# Altium PCB 智能家居-开关-功率测量板.PcbDoc
Units mm, origin at the board's own origin, x right, y up, seen from the top; angles counter-clockwise.
Board outline 37.51 x 32.81 mm, 2 copper layers (Top Layer, Bottom Layer); 19 components, 16 nets, 50 pads, 0 vias.
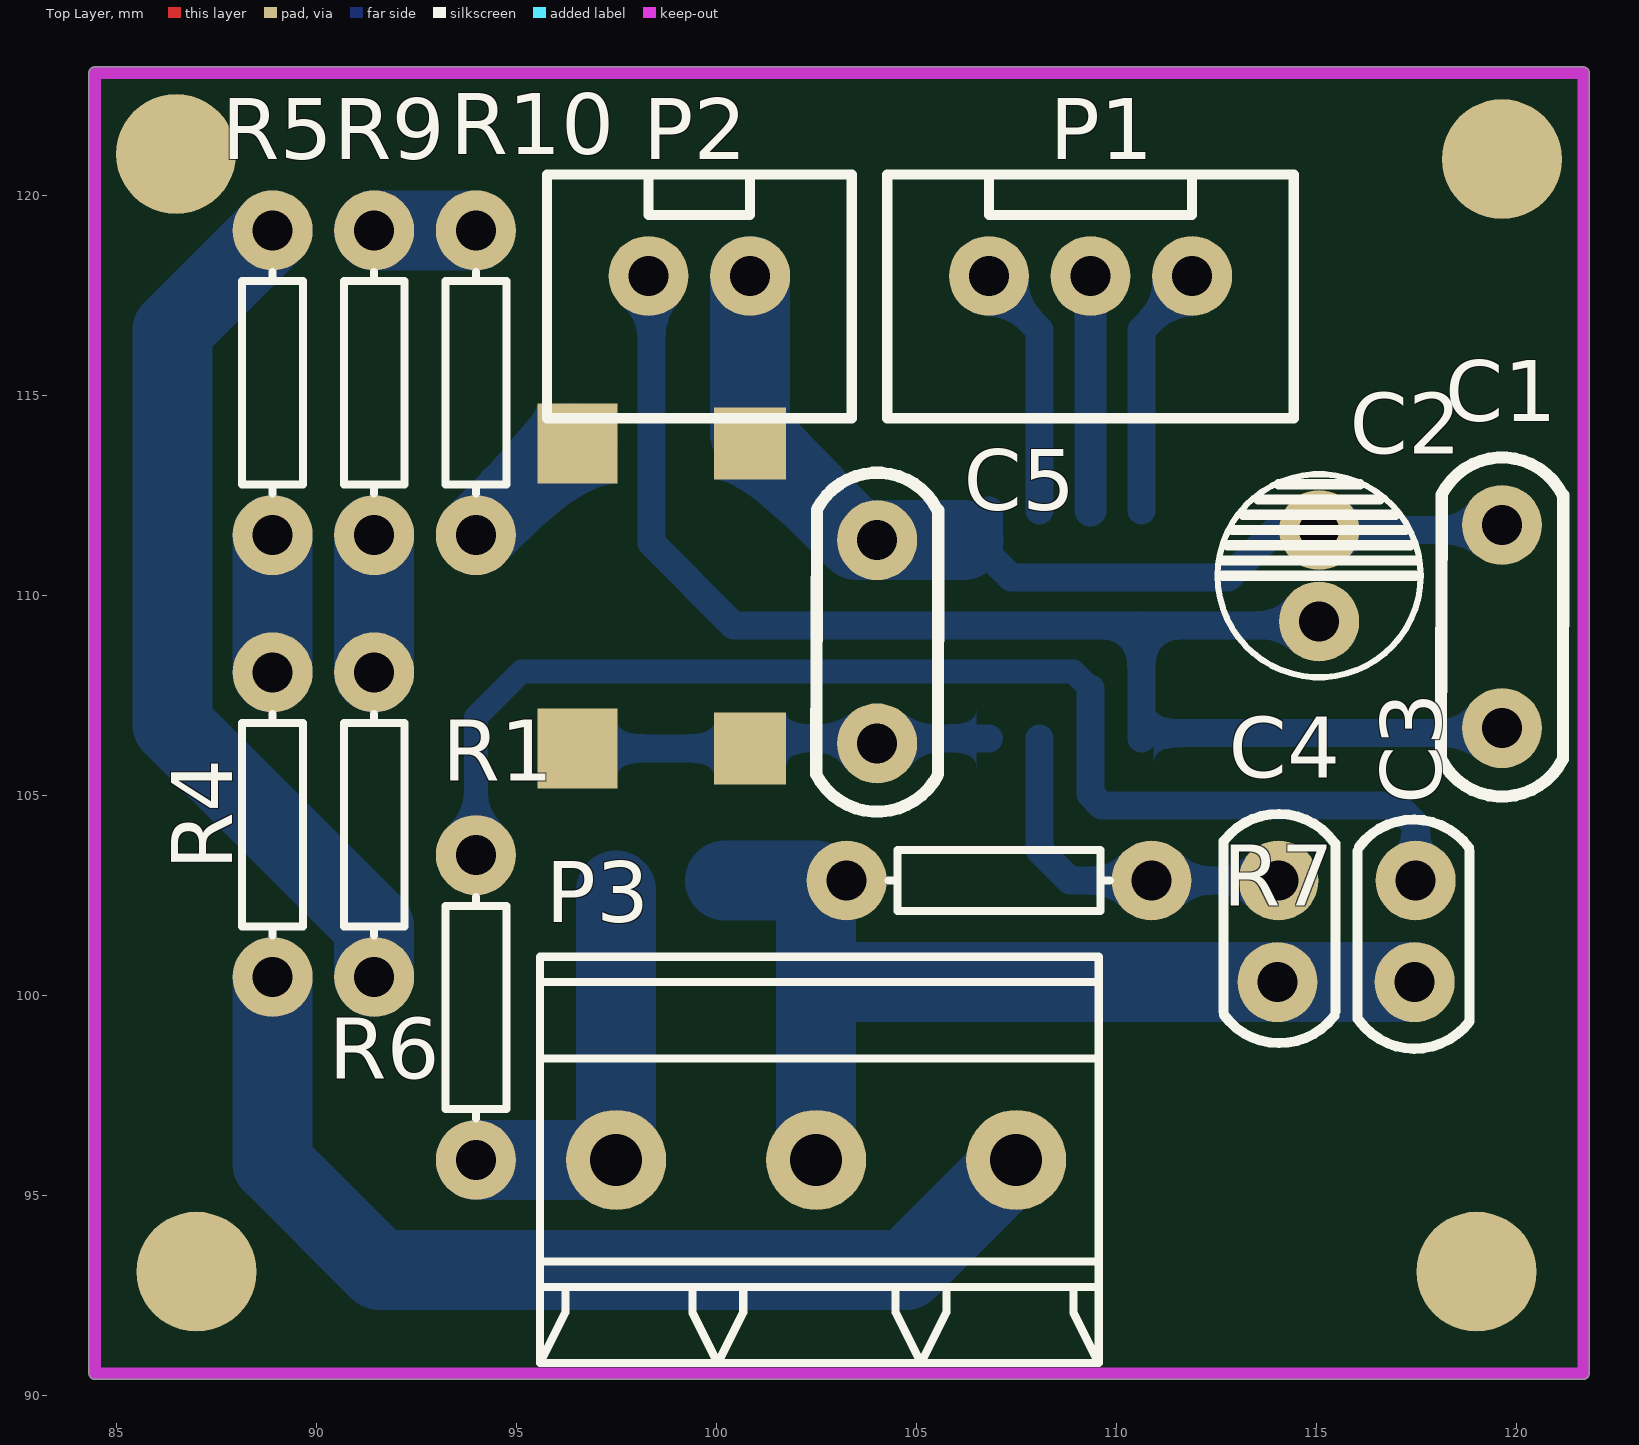
[diagram p0: Top Layer view]
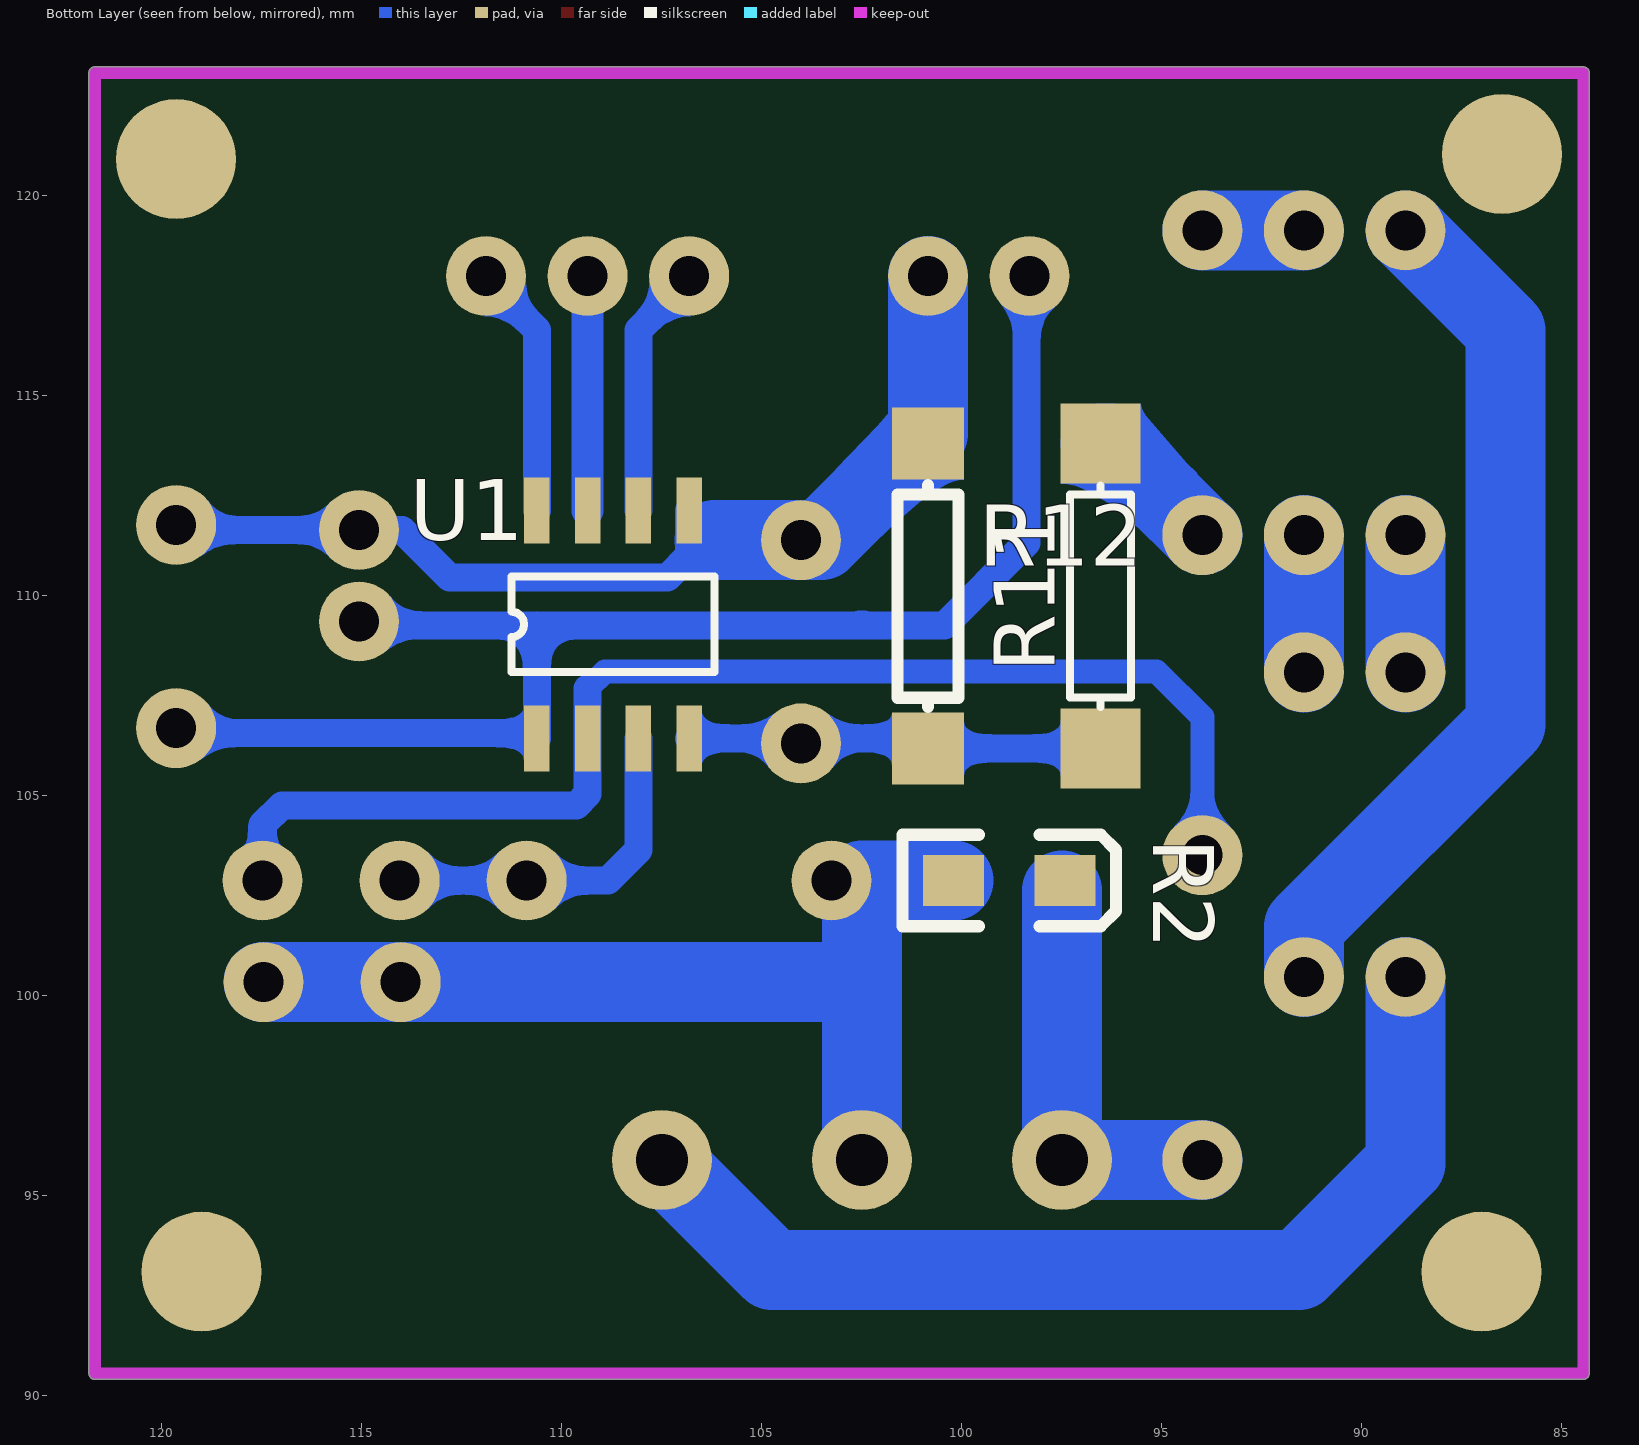
[diagram p1: Bottom Layer view, seen from below]

## Layer stack, top to bottom
Top Solder: solder mask 0.0102, Solder Resist, Dk 3.5
Top Layer: signal copper 0.0356
Dielectric 1: dielectric 0.32, FR-4, Dk 4.8
Bottom Layer: signal copper 0.0356
Bottom Solder: solder mask 0.0102, Solder Resist, Dk 3.5

## Board outline
84.455,90.401 cw(c84.455,90.551) 84.305,90.551 84.305,123.063 cw(c84.455,123.063) 84.455,123.213 121.666,123.213 cw(c121.666,123.063) 121.816,123.063 121.816,90.551 cw(c121.666,90.551) 121.666,90.401

## Design rules (kind name [scope] priority, off if disabled: settings)
Clearance [All] p1: gap=0.5
PolygonConnect [All] p1: connectstyle=Relief reliefconductorwidth=0.254 reliefentries=4 polygonreliefangle="90 Angle" airgapwidth=0.254
RoutingVias [All] p1: holewidth=1 width=2 viastyle="Through Hole" minholewidth=0.711 minwidth=1.27 maxholewidth=0.711 maxwidth=1.27
SolderMaskExpansion [All] p1: expansion=0.102
Width [All] p1: maxlimit=9 minlimit=0.5 preferedwidth=0.5 minimp=50.000000 maximp=50.000000 favimp=50.000000
30 further rules are at their usual default settings.

## Components (designator, comment, footprint, x,y, rotation, side; value= is the part's Value field where it differs from the comment)
C1 "Cap" 0.1UF 119.634,109.22 r270 top
C2 "Cap Pol1" CD5 115.062,109.347 r180 top
C3 "Cap" 150PF 117.475,100.33 r90 top
C4 "Cap" 150PF 114.021,102.87 r270 top
C5 "Cap" 0.1UF 104.013,108.839 r270 top
P1 "功率测量芯片通讯端口" DG1283 114.427,114.427 r180 top
P2 "功率测量芯片电源端口" DG1282 103.378,127.127 r180 top
P3 "电源输入端口" JK128-500-3P 97.489,95.886 r0 top
R1 "1K" AXIAL-0.3#1 93.98,99.695 r270 top
R2 "0.002r/2w/锰铜电阻" 3216 100.203,102.87 r180 bottom
R4 "470K" AXIAL-0.3#1 88.9,104.267 r270 top
R5 "470K" AXIAL-0.3#1 88.9,115.316 r270 top
R6 "470K" AXIAL-0.3#1 91.44,104.267 r270 top
R7 "1K" AXIAL-0.3#1 107.061,102.87 r180 top
R9 "470K" AXIAL-0.3#1 91.44,115.316 r270 top
R10 "470K" AXIAL-0.3#1 93.98,115.316 r90 top
R11 "470K" AXIAL-0.3#2 96.52,109.982 r270 bottom
R12 "1K" AXIAL0.3 100.838,109.982 r270 bottom
U1 "HLW8012" SOP-8 110.617,106.426 r90 bottom

## Footprints (in the part's own frame and the unit in brackets; to place one, negate y for a bottom-side part, rotate by r counter-clockwise, add the part's x,y. Pads: shape width x height; smd on the part's side, far side on the other; paste and mask are expansions set on the pad)
0.1UF [mm]
  round 2 hole 1: 1(-2.54,0) 2(2.54,0)
  silkscreen extent -4.22,-1.52 4.25,1.53
150PF [mm]
  round 2 hole 1: 1(2.54,0) 2(0,0.025)
  silkscreen extent -1.66,-1.35 4.06,1.45
3216 [mil]
  rect 60x50 smd: 1(0,0) 2(110,0)
  silkscreen extent -50,-45 160,45
AXIAL0.3 [mm]
  rect 1.8x1.8 all layers, no hole: 1(-3.81,0) 2(3.81,0)
  silkscreen extent -2.77,-0.76 2.77,0.76
AXIAL-0.3#1 [mm] "Axial Device, Thru-Hole; 2 Leads; 0.3 in Pin Spacing"
  round 2 hole 1: 1(-3.81,0) 2(3.81,0)
  silkscreen extent -2.77,-0.76 2.77,0.76
AXIAL-0.3#2 [mm] "Axial Device, Thru-Hole; 2 Leads; 0.3 in Pin Spacing"
  rect 2x2 all layers, no hole: 1(-3.81,0) 2(3.81,0)
  silkscreen extent -2.77,-0.76 2.77,0.76
CD5 [mm]
  round 2 hole 1: 1(0,0) 2(0,-2.286)
  silkscreen extent -2.54,-3.68 2.54,1.39
DG1282 [mm]
  round 2 hole 1: 1(2.54,9.144) 2(5.08,9.144)
  silkscreen extent 0,6.6 7.62,12.7
DG1283 [mm]
  round 2 hole 1: 1(2.54,-3.556) 2(5.08,-3.556) 3(7.62,-3.556)
  silkscreen extent 0,-6.1 10.16,0
JK128-500-3P [mm]
  round 2.5 hole 1.3: 1(0,-0.001) 2(5,-0.001) 3(10,-0.001)
  silkscreen extent -1.91,-5.08 12.06,5.08
SOP-8 [mil]
  rect 65x25 smd: 1(0,0) 2(0,-50) 3(0,-100) 4(0,-150) 5(224.41,-150) 6(224.41,-100) 7(224.41,-50) 8(224.41,0)
  silkscreen extent 65,-175 159,25

## Part data
C1 C3 C4 C5: "Capacitor"
C2: "Polarized Capacitor (Radial)"
P1 P3: library part "Header 3", "Header, 3-Pin"
P2: library part "Header 2", "Header, 2-Pin"
R1 R2 R4 R5 R6 R7 R9 R10 R11 R12: library part R

## Free pads (board coordinates)
  round 3 all layers, no hole: 2(86.487,121.031) 3(86.995,93.091) 4(118.999,93.091) 5(119.634,120.904)

## Nets (pads, with @x,y where several pads share a name; then routed paths per layer and width w, separated by ;. In a path a pad name is that pad's centre, name@x,y a point inside that pad or via, vN(x,y) a via of type N, cw(c..) or ccw(c..) an arc to the next point about the centre after c; other vN are vias at no path point)
CF: P1.3 U1.6 | length 6.4
  Bottom Layer w0.7: P1.3 106.807,117.907 108.077,116.637 U1.6
CF1: P1.2 U1.7 | length 5.9
  Bottom Layer w0.8: U1.7 P1.2
GND: C1.1 C2.2 C5.1 P2.1 R12.1 U1.5 | length 25
  Bottom Layer w0.7: U1.5 106.807,110.998 107.355,110.45 112.803,110.45 113.985,111.633 C2.2 C1.1@119.634,111.633
  Bottom Layer w2: P2.1 100.838,114.046 103.505,111.379 C5.1 106.172,111.379
L_IN: P3.1 R1.2 R2.2 | length 10.2
  Bottom Layer w2: R1.2 P3.1 R2.2@97.489,102.616
L_OUT: C3.2 C4.1 P3.2 R2.1 R7.2 | length 23.5
  Bottom Layer w2: R2.1 102.489,102.87 P3.2 ; 103.251,100.33 C4.1 C3.2
N: P3.3 R4.2 | length 25.5
  Bottom Layer w2: R4.2 88.9,95.802 91.567,93.135 104.739,93.135 P3.3
NetC3_1: C3.1 R1.1 U1.2 | length 31.8
  Bottom Layer w0.6: R1.1 93.98,106.957 95.123,108.1 108.916,108.1 109.347,107.669
  Bottom Layer w0.7: 109.347,107.669 U1.2 109.347,105.029 109.626,104.75 116.992,104.75 117.475,104.267 C3.1@117.475,102.997
NetC4_2: C4.2 R7.1 U1.3 | length 9.1
  Bottom Layer w0.7: U1.3 108.077,103.632 108.839,102.87 R7.1 C4.2
NetC5_2: C5.2 R11.2 R12.2 U1.4 | length 10.3
  Bottom Layer w0.7: R11.2 R12.2 ; R12.2@100.838,106.426 U1.4
NetR4_1: R4.1 R5.2 | length 3.4
  Bottom Layer w2: R4.1 R5.2
NetR5_1: R5.1 R6.2 | length 21.8
  Bottom Layer w2: R5.1 86.4,116.626 86.4,106.767 91.44,101.727 R6.2
NetR6_1: R6.1 R9.2 | length 3.4
  Bottom Layer w2: R6.1 R9.2
NetR9_1: R9.1 R10.2 | length 2.5
  Bottom Layer w2: R9.1 R10.2
NetR10_1: R10.1 R11.1 | length 3.5
  Bottom Layer w2: R10.1 96.266,113.792 R11.1
SEL: P1.1 U1.8 | length 6.4
  Bottom Layer w0.7: U1.8 110.617,116.637 111.887,117.907 P1.1
VCC-5: C1.2 C2.1 P2.2 U1.1 | length 36.1
  Bottom Layer w0.7: P2.2@98.37,117.983 P2.2 98.37,117.911 98.37,111.307 100.427,109.25 102.571,109.25 ; 102.433,109.276 102.546,109.276 102.571,109.25 ; U1.1 110.617,109.25 ; U1.1@110.871,106.553 C1.2@119.634,106.553 ; C2.1 114.965,109.25 110.617,109.25 ; 102.571,109.25 110.617,109.25

## Keep-outs
Keep-Out Layer:
  lines w0.3: 84.455,90.551 84.455,123.063 121.666,123.063 121.666,90.551 84.455,90.551

## Silkscreen, mask and mechanical layers (free items; w line width, h text height)
Drill Drawing:
  text ".LEGEND" at 182.88,81.28 h1.52
  text "Drill Drawing." at 182.88,78.74 h1.52

## Dimensions
84.455,90.551 to 84.455,123.063 on Mechanical 1
84.455,90.551 to 121.666,90.551 on Mechanical 1